# Altium PCB PCB_ControlDevBoard_LCD_2024-05-12.pcbdoc
Units mm, origin at the board's own origin, x right, y up, seen from the top; angles counter-clockwise.
Board outline 173.65 x 105.67 mm, 2 copper layers (Top Layer, Bottom Layer); 27 components, 73 nets, 151 pads, 11 vias.
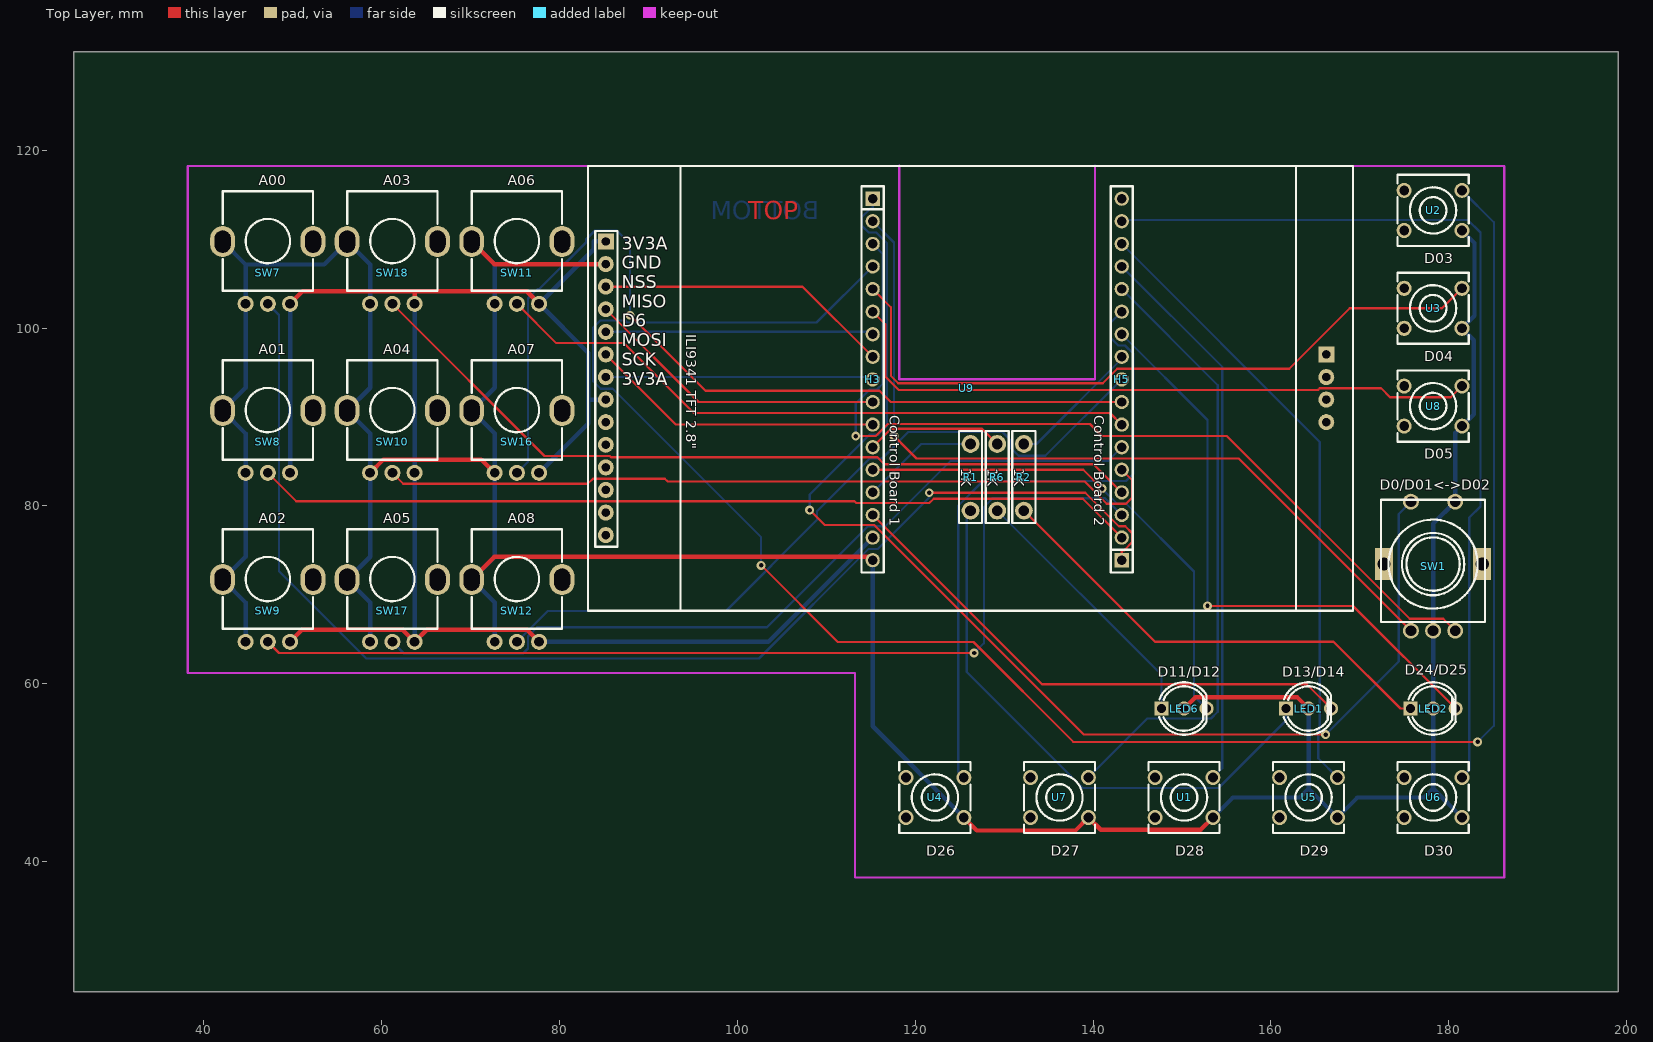
[diagram p0: Top Layer view]
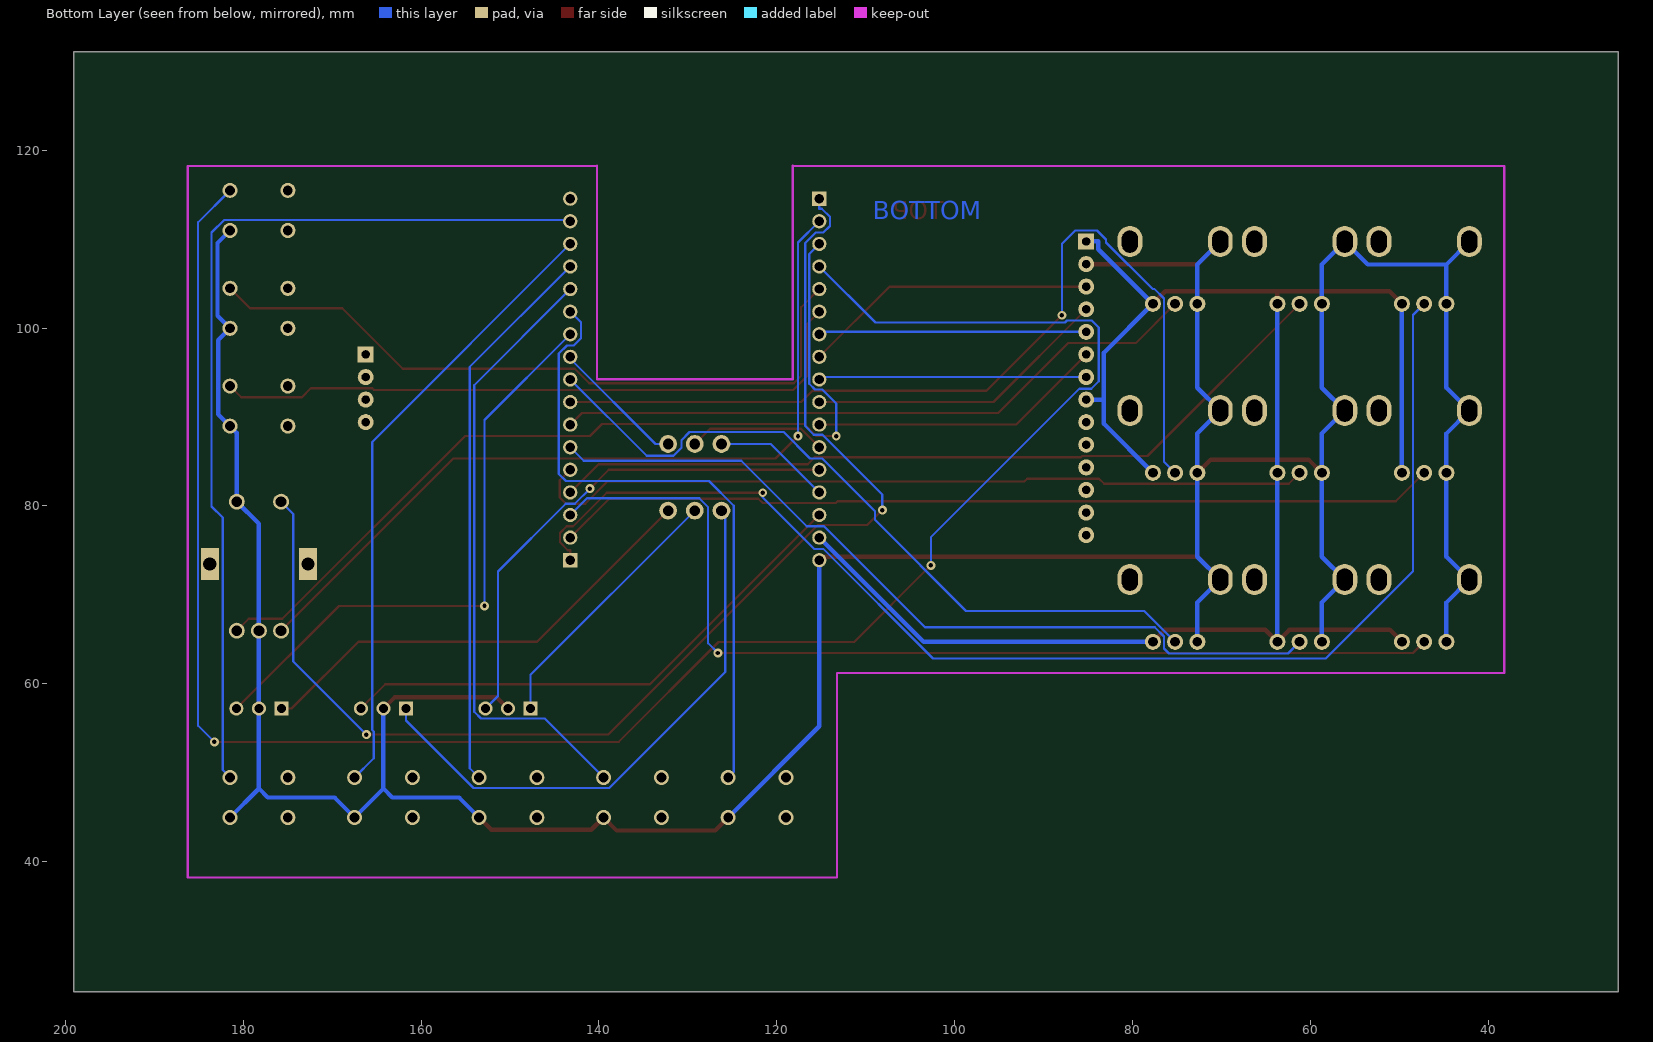
[diagram p1: Bottom Layer view, seen from below]

## Layer stack, top to bottom
Top Solder: solder mask 0.0102, Solder Resist, Dk 3.5
Top Layer: signal copper 0.0356
Dielectric1: dielectric 0.32, FR-4, Dk 4.8
Bottom Layer: signal copper 0.0356
Bottom Solder: solder mask 0.0102, Solder Resist, Dk 3.5

## Board outline
199.054,25.4 25.4,25.4 25.4,131.074 199.054,131.074

## Design rules (kind name [scope] priority, off if disabled: settings)
Clearance [All] p1: gap=0.254 ignorepadtopadclearanceinfootprint=FALSE except(0: Arc-Hole Track-Hole SMDPad-Hole THPad-Hole Via-Hole Fill-Hole Poly-Hole Region-Hole Text-Hole)
PolygonConnect [All] p1: connectstyle=Relief reliefconductorwidth=0.254 reliefentries=4 polygonreliefangle="90 Angle" airgapwidth=0.254
RoutingVias [All] p1: holewidth=0.711 width=1.27 viastyle="Through Hole" minholewidth=0.711 minwidth=1.27 maxholewidth=0.711 maxwidth=1.27
SolderMaskExpansion [All] p1: expansion=0.102 istentingtop=FALSE
Width [All] p1: maxlimit=0.254 minlimit=0.254 preferedwidth=0.254
30 further rules are at their usual default settings.

## Components (designator, comment, footprint, x,y, rotation, side; value= is the part's Value field where it differs from the comment)
H3 "Control Board 1" HDR-TH_17P-P2.54-V-M 115.227,94.227 r270 top
H5 "Control Board 2" HDR-TH_17P-P2.54-V-M 143.227,94.227 r90 top
LED1 "D13/D14" LED-TH_3P-BD5.9-P2.54-BI 164.227,57.227 r0 top
LED2 "D24/D25" LED-TH_3P-BD5.9-P2.54-BI 178.227,57.227 r0 top
LED6 "D11/D12" LED-TH_3P-BD5.9-P2.54-BI 150.227,57.227 r0 top
R1 "1K" PS-RES-16.5*6.42 126.227,83.227 r270 top
R2 "1K" PS-RES-16.5*6.42 132.227,83.227 r270 top
R6 "1K" PS-RES-16.5*6.42 129.227,83.227 r270 top
SW1 "D0/D01<->D02" SW7-13.75X11.7X6.5MM 178.227,73.227 r0 top
SW7 "A00" RES-ADJ-TH_RK09D1130C4G 47.227,106.227 r0 top
SW8 "A01" RES-ADJ-TH_RK09D1130C4G 47.227,87.227 r0 top
SW9 "A02" RES-ADJ-TH_RK09D1130C4G 47.227,68.227 r0 top
SW10 "A04" RES-ADJ-TH_RK09D1130C4G 61.227,87.227 r0 top
SW11 "A06" RES-ADJ-TH_RK09D1130C4G 75.227,106.227 r0 top
SW12 "A08" RES-ADJ-TH_RK09D1130C4G 75.227,68.227 r0 top
SW16 "A07" RES-ADJ-TH_RK09D1130C4G 75.227,87.227 r0 top
SW17 "A05" RES-ADJ-TH_RK09D1130C4G 61.227,68.227 r0 top
SW18 "A03" RES-ADJ-TH_RK09D1130C4G 61.227,106.227 r0 top
U1 "D28" SW-TH_4P-L8.0-W8.0-P6.50-LS4.5 150.227,47.227 r0 top
U2 "D03" SW-TH_4P-L8.0-W8.0-P6.50-LS4.5 178.227,113.227 r0 top
U3 "D04" SW-TH_4P-L8.0-W8.0-P6.50-LS4.5 178.227,102.227 r0 top
U4 "D26" SW-TH_4P-L8.0-W8.0-P6.50-LS4.5 122.227,47.227 r0 top
U5 "D29" SW-TH_4P-L8.0-W8.0-P6.50-LS4.5 164.227,47.227 r0 top
U6 "D30" SW-TH_4P-L8.0-W8.0-P6.50-LS4.5 178.227,47.227 r0 top
U7 "D27" SW-TH_4P-L8.0-W8.0-P6.50-LS4.5 136.227,47.227 r0 top
U8 "D05" SW-TH_4P-L8.0-W8.0-P6.50-LS4.5 178.227,91.227 r0 top
U9 "ILI9341 TFT 2.8\"" ILI9341-2.8 83.227,118.227 r180 top

## Footprints (in the part's own frame and the unit in brackets; to place one, negate y for a bottom-side part, rotate by r counter-clockwise, add the part's x,y. Pads: shape width x height; smd on the part's side, far side on the other; paste and mask are expansions set on the pad)
HDR-TH_17P-P2.54-V-M [mm]
  rect 1.6x1.6 hole 1.05 paste+0 mask+0.051: 1(-20.32,0)
  round 1.6 hole 1.05 paste+0 mask+0.051: 2(-17.78,0) 3(-15.24,0) 4(-12.7,0) 5(-10.16,0) 6(-7.62,0) 7(-5.08,0) 8(-2.54,0) 9(0,0) 10(2.54,0) 11(5.08,0) 12(7.62,0) 13(10.16,0) 14(12.7,0) 15(15.24,0) 16(17.78,0) 17(20.32,0)
  silkscreen extent -21.71,-1.25 21.71,1.25
ILI9341-2.8 [mm]
  rect 1.8x1.8 hole 0.9 slot 0.905 at 0 deg paste+0 mask+0.051: 1(-1.997,8.49) 15(-82.997,21.189)
  round 1.8 hole 0.9 slot 0.905 at 0 deg paste+0 mask+0.051: 2(-1.994,11.029) 3(-1.994,13.569) 4(-1.994,16.109) 5(-1.994,18.649) 6(-1.994,21.189) 7(-1.994,23.729) 8(-1.994,26.266) 9(-1.994,28.806) 10(-1.994,31.346) 11(-1.994,33.886) 12(-1.994,36.426) 13(-1.994,38.966) 14(-1.994,41.506) 16(-82.997,23.729) 17(-82.997,26.266) 18(-82.997,28.806)
  silkscreen extent -86,0 0,50
LED-TH_3P-BD5.9-P2.54-BI [mm]
  rect 1.6x1.6 hole 1 paste+0 mask+0.051: 1(-2.54,0)
  round 1.6 hole 1 paste+0 mask+0.051: 2(0,0) 3(2.54,0)
  silkscreen extent -2.79,-2.95 2.54,2.95
PS-RES-16.5*6.42 [mm]
  round 2 hole 1.2 paste+0 mask+0.051: 1(-3.749,0) 2(3.749,0)
  silkscreen extent -5.2,-1.3 5.15,1.3
RES-ADJ-TH_RK09D1130C4G [mm]
  round 1.8 hole 1.1 paste+0 mask+0.05: 1(-2.5,-3.5) 2(0,-3.5) 3(2.5,-3.5)
  oval 2.8x3.5 hole 1.8 slot 2.5 at 90 deg paste+0 mask+0.05: 4(-5.08,3.5) 5(5.08,3.5)
  silkscreen extent -5.08,-2.03 5.08,9.14
SW7-13.75X11.7X6.5MM [mil]
  round 70.9 hole 47.2 paste+0 mask+2: 1(-98,-285.5) 2(0,-285.5) 3(98,-285.5) 4(98,285.5) 5(-98,285.5)
  rect 78.7x141.7 hole 59 paste+0 mask+2: P1(-217,9.5) P2(217,9.5)
  silkscreen extent -230,-246 230,294
SW-TH_4P-L8.0-W8.0-P6.50-LS4.5 [mm]
  round 1.7 hole 1.1 paste+0 mask+0.05: 1(-3.25,2.25) 2(3.25,2.25) 3(-3.25,-2.25) 4(3.25,-2.25)
  silkscreen extent -4,-4 4,4

## Via types
v1: diameter 1, hole 0.5, Top Layer to Bottom Layer, 11 vias

## Nets (pads, with @x,y where several pads share a name; then routed paths per layer and width w, separated by ;. In a path a pad name is that pad's centre, name@x,y a point inside that pad or via, vN(x,y) a via of type N, cw(c..) or ccw(c..) an arc to the next point about the centre after c; other vN are vias at no path point)
3V3A: H3.16 SW7.3 SW8.3 SW9.3 SW10.3 SW11.3 SW12.3 SW16.3 SW17.3 SW18.3 U9.1 U9.8 | length 196.6
  Top Layer w0.5: SW9.3 51.078,66.078 62.375,66.078 SW17.3 65.083,66.083 76.371,66.083 SW12.3 ; SW7.3 51.133,104.133 63.727,104.133 ; SW18.3 63.727,104.133 ; SW11.3 76.32,104.133 63.727,104.133
  Bottom Layer w0.5: SW8.3 SW7.3 ; SW17.3 SW10.3 SW18.3 ; SW12.3 103.507,64.727 H3.16 ; SW16.3 83.23,89.23 83.23,91.961 ; U9.8 83.23,91.961 ; U9.1 83.873,109.737 83.873,108.873 SW11.3 83.23,97.223 83.23,91.961
3V3D: H5.17
A00/D15: H5.1 SW7.2 | length 144.2
  Top Layer w0.25: v1(121.587,81.49) 139.13,81.49 142.903,77.717 143.628,77.717 144.387,76.958 144.387,75.911 143.508,75.032 143.227,75.032 H5.1
  Bottom Layer w0.25: SW7.2 48.477,101.477 48.477,72.667 58.283,62.861 102.456,62.861 114.772,75.177 115.814,75.177 121.587,80.95 v1(121.587,81.49)
A01/D16: H5.2 SW8.2 | length 99.4
  Top Layer w0.25: SW8.2 50.423,80.53 113.188,80.53 113.394,80.324 121.591,80.324 122.088,80.822 138.852,80.822 H5.2
A02/D17: H5.3 SW9.2 | length 113.5
  Top Layer w0.25: SW9.2 48.484,63.47 v1(126.625,63.47)
  Bottom Layer w0.25: v1(126.625,63.47) 127.727,64.572 127.727,79.854 128.737,80.863 141.35,80.863 H5.3
A03/D18: H5.4 SW18.2 | length 90.8
  Top Layer w0.25: SW18.2 78.339,85.615 85.682,85.615 85.816,85.48 115.758,85.48 116.536,84.701 140.052,84.701 H5.4
A04/D19: H5.5 SW10.2 | length 89
  Top Layer w0.25: SW10.2 62.457,82.497 83.202,82.497 83.776,83.071 91.853,83.071 92.157,82.767 139.031,82.767 141.541,80.257 143.702,80.257 144.406,80.96 144.406,82.888 H5.5
A05/D20: H5.6 SW17.2 | length 93
  Bottom Layer w0.25: SW17.2 62.542,63.412 75.921,63.412 76.477,63.968 76.477,65.338 77.507,66.368 103.346,66.368 114.694,77.717 116.646,77.717 124.008,85.079 141.699,85.079 H5.6
A06/D21: H5.7 SW11.2 | length 73.6
  Top Layer w0.25: SW11.2 79.645,98.308 87.264,98.308 95.117,90.455 141.918,90.455 H5.7
A07/D22: H5.8 SW16.2 | length 102.9
  Top Layer w0.25: v1(87.947,101.442) 96.433,92.957 115.987,92.957 117.257,91.687 H5.8
  Bottom Layer w0.25: SW16.2 76.477,84.977 76.477,103.317 77.568,104.408 77.78,104.408 82.995,109.623 82.995,109.959 84.001,110.964 86.45,110.964 87.947,109.467 v1(87.947,101.442)
A08/D23: H5.9 SW12.2 | length 83.5
  Bottom Layer w0.25: SW12.2 78.703,68.203 98.732,68.203 108.971,78.442 108.971,79.406 114.902,85.337 116.266,85.337 119.24,88.311 129.817,88.311 130.727,87.401 130.727,86.534 131.62,85.64 134.64,85.64 H5.9
A09/D24: H5.10 R2.1 | length 15.2
  Bottom Layer w0.25: R2.1 133.654,86.976 143.227,96.548 H5.10
A10/D25: H5.11 LED2.3 | length 67.2
  Top Layer w0.25: v1(152.87,68.764) 169.23,68.764 LED2.3
  Bottom Layer w0.25: H5.11 152.87,89.663 v1(152.87,68.764)
A11/D28: H5.14 U1.2 | length 62.6
  Bottom Layer w0.25: H5.14 154.515,95.639 154.515,50.514 U1.2
D00: H3.1 SW1.5 | length 140.1
  Top Layer w0.25: v1(108.145,79.54) 109.825,77.86 115.407,77.86 138.961,54.306 v1(166.153,54.306)
  Bottom Layer w0.25: v1(108.145,79.54) 108.145,81.298 114.867,88.02 115.846,88.02 116.811,88.984 116.811,109.554 115.627,110.737 114.772,110.737 114.036,111.473 114.036,112.512 114.945,113.421 115.227,113.421 H3.1 ; v1(166.153,54.306) 174.36,62.512 174.36,79.101 SW1.5
D01: H3.2 SW1.1 | length 92.3
  Top Layer w0.25: v1(117.62,87.86) 120.145,85.336 156.377,85.336 SW1.1
  Bottom Layer w0.25: H3.2 117.62,109.613 v1(117.62,87.86)
D02: H3.3 SW1.3 | length 101.4
  Top Layer w0.25: v1(113.328,87.854) 115.55,87.854 116.918,89.222 139.656,89.222 141.001,87.877 155.046,87.877 175.602,67.32 179.371,67.32 SW1.3
  Bottom Layer w0.25: v1(113.328,87.854) 113.328,91.526 114.903,93.1 115.705,93.1 116.354,93.748 116.354,108.34 H3.3
D03: H3.4 U2.2 | length 222.8
  Top Layer w0.25: v1(102.684,73.323) 111.311,64.696 126.568,64.696 137.786,53.479 v1(183.242,53.479)
  Bottom Layer w0.25: v1(102.684,73.323) 102.684,76.493 85.99,93.187 84.65,93.187 83.807,94.031 83.807,100.065 84.59,100.848 87.373,100.848 87.605,100.616 108.916,100.616 H3.4 ; U2.2 185.065,111.888 185.065,55.302 v1(183.242,53.479)
D04: H3.5 U3.2 | length 79.6
  Top Layer w0.25: H3.5 117.273,102.34 117.273,94.631 118.101,93.804 141.095,93.804 142.721,95.43 162.069,95.43 168.866,102.227 179.227,102.227 U3.2@181.477,104.476
D05: H3.6 U8.2 | length 74.4
  Top Layer w0.25: H3.6 116.639,100.435 116.639,94.554 118.151,93.042 165.303,93.042 165.491,93.229 172.389,93.229 173.39,92.228 180.228,92.228 U8.2
D06: H3.7 U9.5 | length 30.1
  Bottom Layer w0.25: U9.5 114.956,99.578 H3.7
D07: H3.8 U9.3 | length 33.3
  Top Layer w0.25: U9.3 107.336,104.658 H3.8
D08: H3.9 U9.7 | length 30.1
  Bottom Layer w0.25: U9.7 114.956,94.498 H3.9
D09: H3.10 U9.4 | length 34.3
  Top Layer w0.25: U9.4 95.652,91.687 H3.10
D10: H3.11 U9.6 | length 33.3
  Top Layer w0.25: U9.6 93.112,89.147 H3.11
D11: H3.12 R6.1 | length 15.6
  Top Layer w0.25: H3.12 115.227,86.635 117.278,88.687 127.516,88.687 R6.1
D12: H3.13 LED6.3 | length 56.9
  Top Layer w0.25: H3.13 138.9,84.067 v1(141.015,81.951)
  Bottom Layer w0.25: v1(141.015,81.951) 142.71,80.257 143.737,80.257 151.353,72.641 151.353,58.64 LED6.3
D13: H3.14 R1.1 | length 13.3
  Bottom Layer w0.25: H3.14 120.676,86.976 R1.1
D14: H3.15 LED1.3 | length 60.6
  Top Layer w0.25: H3.15 134.259,59.954 164.039,59.954 LED1.3
D26: H5.12 U4.2 | length 72.2
  Bottom Layer w0.25: U4.2 124.857,50.096 124.857,80.016 127.638,82.797 143.712,82.797 144.509,83.594 144.509,97.133 143.605,98.037 142.847,98.037 142.022,98.862 142.022,100.642 H5.12
D27: H5.13 U7.2 | length 69.6
  Bottom Layer w0.25: U7.2 146.1,56.1 153.257,56.1 154.032,56.876 154.032,93.581 H5.13
D29: H5.15 U5.2 | length 70.2
  Bottom Layer w0.25: H5.15 165.497,87.197 165.497,54.818 165.327,54.648 165.327,51.626 U5.2
D30: H5.16 U6.2 | length 103.1
  Bottom Layer w0.25: H5.16 143.379,112.159 182.134,112.159 183.548,110.745 183.548,79.937 182.305,78.694 182.305,50.305 U6.2
GND: H3.17 LED1.2 LED2.2 LED6.2 SW1.2 SW1.4 SW7.1 SW7.4 SW8.1 SW8.4 SW9.1 SW9.4 SW10.1 SW10.4 SW11.1 SW11.4 SW12.1 SW12.4 SW16.1 SW16.4 SW17.1 SW17.4 SW18.1 SW18.4 U1.4 U2.4 U3.4 U4.4 U5.4 U6.4 U7.4 U8.4 U9.2 | length 428.5
  Top Layer w0.5: SW10.1 60.22,85.22 71.233,85.22 SW16.1 ; SW12.4 72.695,74.275 114.859,74.275 H3.17 ; SW11.4@70.147,109.727 72.675,107.198 U9.2 ; U4.4@125.477,44.977 126.936,43.518 138.018,43.518 139.477,44.977 140.865,43.589 152.089,43.589 U1.4@153.477,44.977 ; LED6.2 151.478,58.479 162.975,58.479 LED1.2
  Bottom Layer w0.5: SW7.4@42.147,109.727 44.727,107.147 ; SW9.1 44.727,69.147 SW9.4 44.727,74.307 SW8.1 44.727,88.147 SW8.4 44.727,93.307 SW7.1 44.727,107.147 ; SW17.1 58.727,69.147 SW17.4 58.727,74.307 SW10.1 58.727,88.147 SW10.4 58.727,93.307 SW18.1 58.727,107.147 56.147,109.727 53.567,107.147 44.727,107.147 ; SW11.4@70.147,109.727 72.727,107.147 SW11.1 72.727,93.307 SW16.4 72.727,88.147 SW16.1 72.727,74.307 SW12.4 72.727,69.147 SW12.1 ; H3.17 115.227,55.227 U4.4@125.477,44.977 ; U1.4@153.477,44.977 155.727,47.227 163.227,47.227 164.227,48.227 ; LED1.2 164.227,48.227 ; U6.4@181.477,44.977 178.307,48.147 178.227,48.227 ; U2.4@181.477,110.977 182.888,109.566 182.888,101.388 181.477,99.977 182.824,98.63 182.824,90.324 181.477,88.977 180.716,88.216 SW1.4 178.227,77.989 SW1.2 LED2.2 178.227,48.227 ; 164.227,48.227 167.477,44.977 169.727,47.227 177.227,47.227 178.227,48.227
LED2_1: LED2.1 R2.2 | length 52.7
  Top Layer w0.25: R2.2 146.957,64.748 167.04,64.748 174.561,57.227 LED2.1
LED6_1: LED6.1 R6.2 | length 29.9
  Bottom Layer w0.25: R6.2 147.687,61.018 LED6.1
R1_2: LED1.1 R1.2 | length 64.1
  Bottom Layer w0.25: R1.2 125.799,79.05 125.799,61.346 138.853,48.292 154.101,48.292 161.687,55.878 LED1.1
S$106: 
SW7_5: SW7.5
SW8_5: SW8.5
SW9_5: SW9.5
SW10_5: SW10.5
SW11_5: SW11.5
SW12_5: SW12.5
SW16_5: SW16.5
SW17_5: SW17.5
SW18_5: SW18.5
U1_1: U1.1
U1_3: U1.3
U2_1: U2.1
U2_3: U2.3
U3_1: U3.1
U3_3: U3.3
U4_1: U4.1
U4_3: U4.3
U5_1: U5.1
U5_3: U5.3
U6_1: U6.1
U6_3: U6.3
U7_1: U7.1
U7_3: U7.3
U8_1: U8.1
U8_3: U8.3
U9_9: U9.9
U9_10: U9.10
U9_11: U9.11
U9_12: U9.12
U9_13: U9.13
U9_14: U9.14
U9_15: U9.15
U9_16: U9.16
U9_17: U9.17
U9_18: U9.18
pads on no net: SW1.P1 SW1.P2

## Other copper
Top Layer:
  text "TOP" at 101.227,112.211 h2.03
Bottom Layer:
  text "BOTTOM" at 109.227,112.211 h2.03

## Silkscreen, mask and mechanical layers (free items; w line width, h text height)
Top Overlay:
  text "3V3A / GND / NSS / MISO / D6 / MOSI / SCK / 3V3A" at 86.995,93.599 h1.45